# Altium PCB sm.PcbDoc
Units mil, origin at the board's own origin, x right, y up, seen from the top; angles counter-clockwise.
Board outline 3915 x 2455 mil, 2 copper layers (Top Layer, Bottom Layer); 29 components, 39 nets, 161 pads, 47 vias.
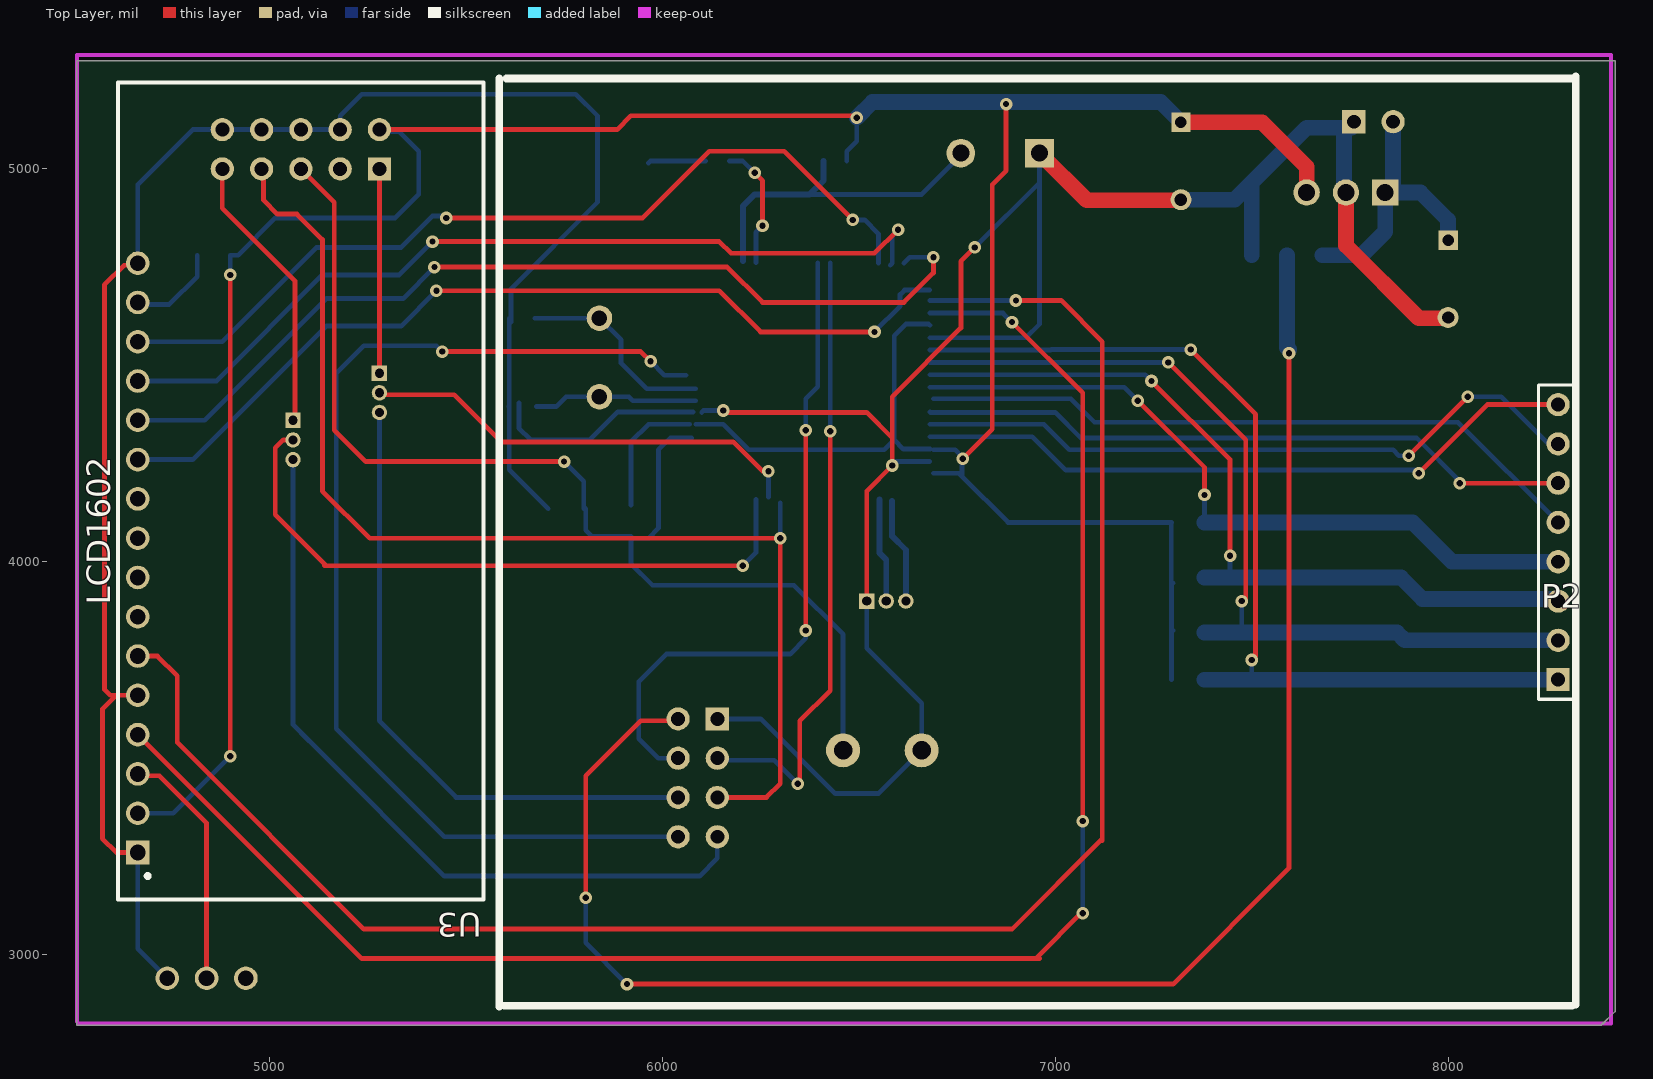
[diagram p0: Top Layer view]
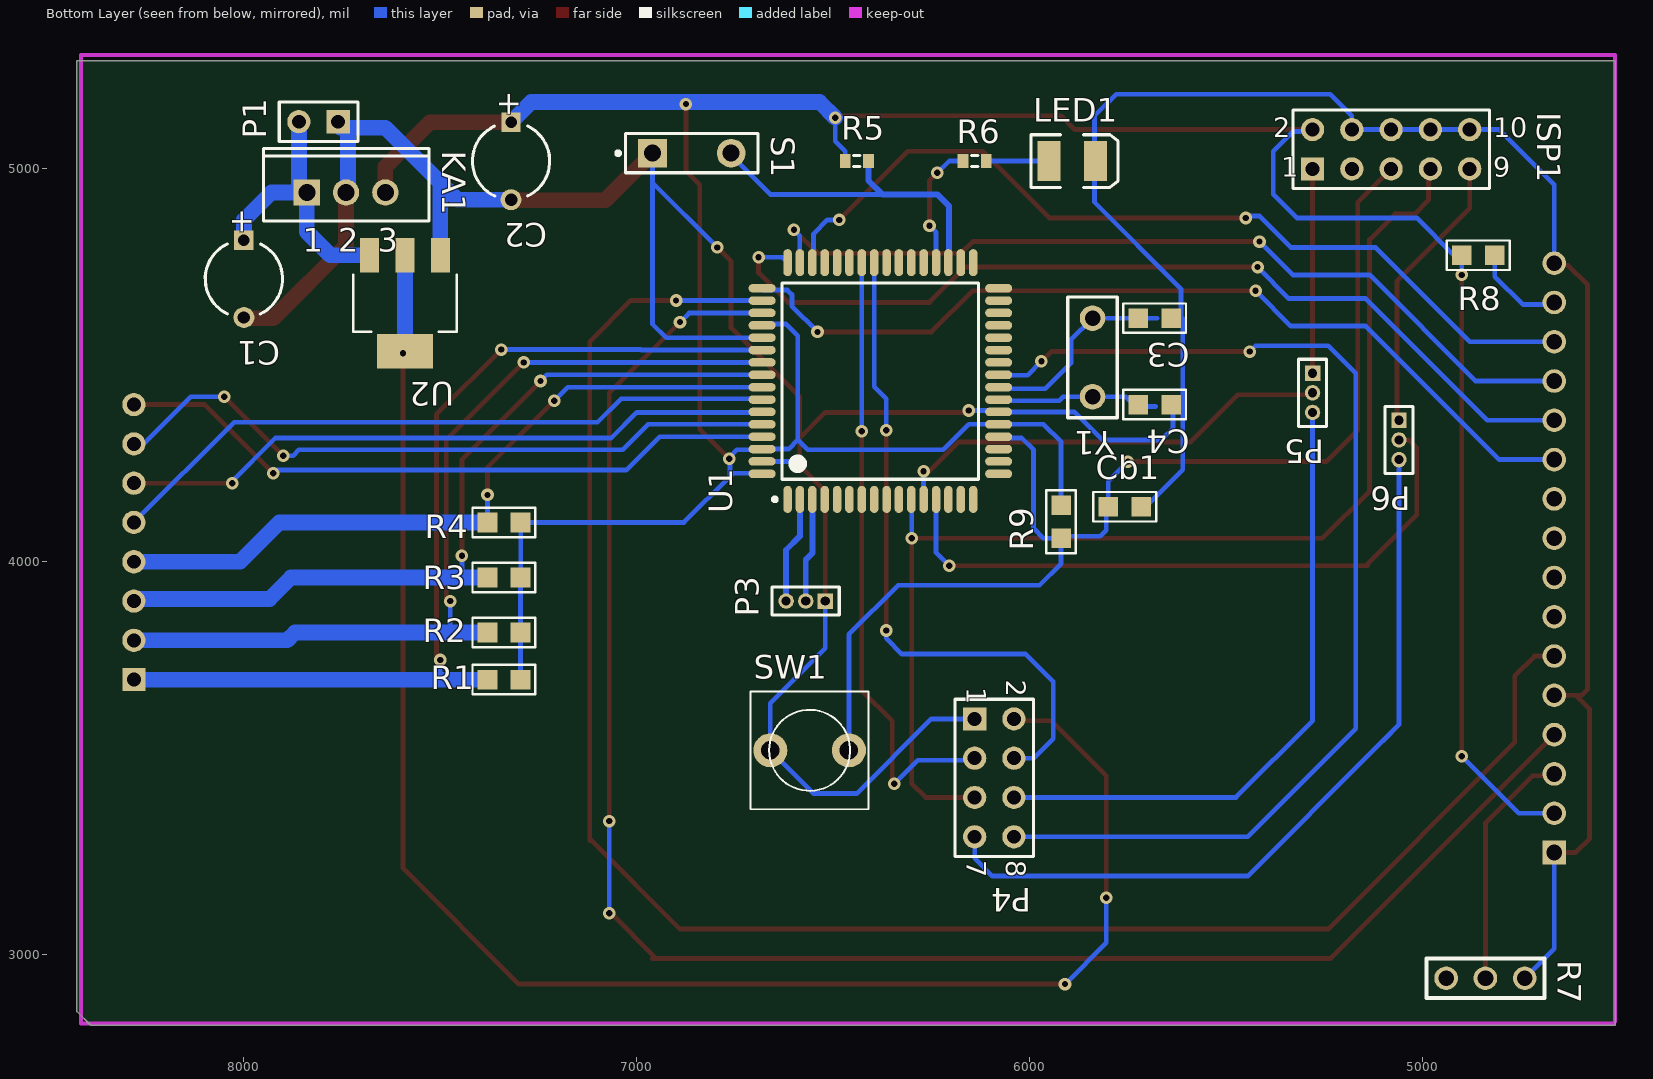
[diagram p1: Bottom Layer view, seen from below]

## Layer stack, top to bottom
Top Layer: signal copper 1.4
Dielectric: dielectric 12.6, FR-4, Dk 4.8
Bottom Layer: signal copper 1.4

## Board outline
4510,2820 8390,2820 8425,2855 8425,5275 4510,5275 4510,2820

## Design rules (kind name [scope] priority, off if disabled: settings)
Clearance Clearance_1 [InNamedPolygon('Bottom Layer-No Net')] p1: gap=30
Clearance [All] p2: gap=10
PolygonConnect [All] p1: connectstyle=Relief reliefconductorwidth=10 reliefentries=4 polygonreliefangle="90 Angle"
RoutingVias [All] p1: holewidth=16 width=32 viastyle="Through Hole" minholewidth=16 minwidth=32 maxholewidth=16 maxwidth=32
SilkscreenOverComponentPads [All] p1: minsilkscreentomaskgap=10
SolderMaskExpansion [All] p1: expansion=4
Width [All] p1: maxlimit=12 minlimit=12 preferedwidth=12
27 further rules are at their usual default settings.

## Components (designator, comment, footprint, x,y, rotation, side; value= is the part's Value field where it differs from the comment)
C1 "Cap Pol1" CAPPR5-5x5 8000,4720 r270 bottom
C2 "Cap Pol1" CAPPR5-5x5 7320,5020 r270 bottom
C3 "Cap" SM/C_0805 5640,4620 r0 bottom
C4 "Cap" SM/C_0805 5640,4400 r0 bottom
Cb1 "10uF" SM/C_0805 5800,4140 r180 bottom
ISP1 "Header 5X2" HDR2X5 5280,5000 r180 bottom
KA1 "Volt Reg" TO-220 7740,4940 r180 bottom
LED1 "LED3" DSO-C2/D5.6 5891.81,5020 r180 bottom
P1 "Header 2" HDR1X2 7760,5120 r0 bottom
P2 "Header 8" HDR1X8 8280,3700 r90 top
P3 "MHDR1X3" MHDR1X3 6520,3900 r0 bottom
P4 "Header 4X2" HDR2X4 6140,3600 r270 bottom
P5 "MHDR1X3" MHDR1X3 5280,4480 r270 bottom
P6 "MHDR1X3" MHDR1X3 5060,4360 r270 bottom
R1 "10K" SM/C_0805 7380,3700 r180 bottom
R2 "10K" SM/C_0805 7380,3820 r180 bottom
R3 "10K" SM/C_0805 7380,3960 r180 bottom
R4 "10K" SM/C_0805 7380,4100 r180 bottom
R5 "Res3" RESC1608L 6440,5020 r180 bottom
R6 "Res3" RESC1608L 6140,5020 r0 bottom
R7 "10k" BienTro 4840,2940 r270 bottom
R8 "560" SM/C_0805 4900,4780 r180 bottom
R9 "10K" SM/C_0805 5920,4060 r90 bottom
S1 "SW-PB" SPST-2 6860,5040 r180 bottom
SW1 "BUTTON 2 PIN" KEYSMALL2 6660,3520 r180 bottom
U1 "ATmega128-16AC" 64A_N 6380,4460 r90 bottom
U2 "LM1117MP-3.3V" SM/SOT223_1234 7500,4780 r0 bottom
U3 "LCD1602" LCD1602 4165,3960 r180 top
Y1 "XTAL" CAPR5.08-7.8x3.2 5840,4520 r270 bottom

## Footprints (in the part's own frame and the unit in brackets; to place one, negate y for a bottom-side part, rotate by r counter-clockwise, add the part's x,y. Pads: shape width x height; smd on the part's side, far side on the other; paste and mask are expansions set on the pad)
64A_N [mm] "Thin QFP, 64-Leads, Body 14x14mm, Pitch 0.8mm, IPC Medium Density"
  oval 1.75x0.55 smd: 1(-7.65,6) 2(-7.65,5.2) 3(-7.65,4.4) 4(-7.65,3.6) 5(-7.65,2.8) 6(-7.65,2) 7(-7.65,1.2) 8(-7.65,0.4) 9(-7.65,-0.4) 10(-7.65,-1.2) 11(-7.65,-2) 12(-7.65,-2.8) 13(-7.65,-3.6) 14(-7.65,-4.4) 15(-7.65,-5.2) 16(-7.65,-6) 33(7.65,-6) 34(7.65,-5.2) 35(7.65,-4.4) 36(7.65,-3.6) 37(7.65,-2.8) 38(7.65,-2) 39(7.65,-1.2) 40(7.65,-0.4) 41(7.65,0.4) 42(7.65,1.2) 43(7.65,2) 44(7.65,2.8) 45(7.65,3.6) 46(7.65,4.4) 47(7.65,5.2) 48(7.65,6)
  oval 0.55x1.75 smd: 17(-6,-7.65) 18(-5.2,-7.65) 19(-4.4,-7.65) 20(-3.6,-7.65) 21(-2.8,-7.65) 22(-2,-7.65) 23(-1.2,-7.65) 24(-0.4,-7.65) 25(0.4,-7.65) 26(1.2,-7.65) 27(2,-7.65) 28(2.8,-7.65) 29(3.6,-7.65) 30(4.4,-7.65) 31(5.2,-7.65) 32(6,-7.65) 49(6,7.65) 50(5.2,7.65) 51(4.4,7.65) 52(3.6,7.65) 53(2.8,7.65) 54(2,7.65) 55(1.2,7.65) 56(0.4,7.65) 57(-0.4,7.65) 58(-1.2,7.65) 59(-2,7.65) 60(-2.8,7.65) 61(-3.6,7.65) 62(-4.4,7.65) 63(-5.2,7.65) 64(-6,7.65)
  silkscreen extent -7.77,-6.35 6.35,6.95, body extent -7,-7 7,7, height 1.2
BienTro [mil]
  round 60 hole 40: 0(0,100) 1(0,0) 2(0,-100)
  silkscreen extent -50,-150 50,150
CAPPR5-5x5 [mm] "Capacitor, Electrolytic, Radial; Body 5 x 5 mm (Dia.xH typ); Pin Spacing 5 mm (typ)"
  rect 1.25x1.25 hole 0.75: 1(-2.5,0)
  round 1.35 hole 0.8: 2(2.5,0)
  silkscreen extent -2.26,-2.5 2.27,2.5
CAPR5.08-7.8x3.2 [mm] "Capacitor, Ceramic, Thru-Hole, Dipped Radial; Body 7.8 x 3.2 mm (WxT) Pin Spacing 5.08 mm (typ)"
  round 1.65 hole 1: 1(-2.54,0) 2(2.54,0)
  silkscreen extent -3.9,-1.6 3.9,1.6
DSO-C2/D5.6 [mm] "SM LED; 2 C-Bend Leads; Body 3.5 x 2.8 x 1.9 mm, inc leads (LxWxH typ)"
  rect 1.5x2.6 smd: 1(-1.5,0) 2(1.5,0)
  silkscreen extent -2.65,-1.7 2.95,1.7
HDR1X2 [mm] "Connector; Header; 2 Position"
  rect 1.5x1.5 hole 0.9: 1(0,0)
  round 1.5 hole 0.9: 2(2.54,0)
  silkscreen extent -1.27,-1.27 3.81,1.27
HDR1X8 [mm] "Connector; Header; 8 Position"
  rect 1.5x1.5 hole 0.9: 1(0,0)
  round 1.5 hole 0.9: 2(2.54,0) 3(5.08,0) 4(7.62,0) 5(10.16,0) 6(12.7,0) 7(15.24,0) 8(17.78,0)
  silkscreen extent -1.27,-1.27 19.05,1.27
HDR2X4 [mm] "Connector; Header; 4x2 Position"
  rect 1.5x1.5 hole 0.9: 1(0,0)
  round 1.5 hole 0.9: 2(0,2.54) 3(2.54,0) 4(2.54,2.54) 5(5.08,0) 6(5.08,2.54) 7(7.62,0) 8(7.62,2.54)
  silkscreen extent -1.27,-1.27 8.89,3.81
HDR2X5 [mm] "Connector; Header; 5x2 Position"
  rect 1.5x1.5 hole 0.9: 1(0,0)
  round 1.5 hole 0.9: 2(0,2.54) 3(2.54,0) 4(2.54,2.54) 5(5.08,0) 6(5.08,2.54) 7(7.62,0) 8(7.62,2.54) 9(10.16,0) 10(10.16,2.54)
  silkscreen extent -1.27,-1.27 11.43,3.81
KEYSMALL2 [mil]
  round 86.6 hole 47.23: 1(0,0) 2(200,0)
  silkscreen extent -50,-150 250,150
LCD1602 [mil]
  rect 60x60 hole 40: 1(-500,700)
  round 60 hole 40: 2(-500,600) 3(-500,500) 4(-500,400) 5(-500,300) 6(-500,200) 7(-500,100) 8(-500,0) 9(-500,-100) 10(-500,-200) 11(-500,-300) 12(-500,-400) 13(-500,-500) 14(-500,-600) 15(-500,-700) 16(-500,-800)
  silkscreen extent -1380,-1260 -450,820
MHDR1X3 [mm] "Connector; Header; 3 Position"
  rect 1x1 hole 0.6: 1(0,0)
  round 1 hole 0.6: 2(1.27,0) 3(2.54,0)
  silkscreen extent -0.9,-0.9 3.44,0.9
RESC1608L [mm] "Chip Resistor, Body 1.6x0.8mm, IPC High Density"
  rect 0.7x0.9 smd: 1(-0.75,0) 2(0.75,0)
  silkscreen extent -0.2,-0.35 0.2,0.35, body extent -0.85,-0.48 0.85,0.48, height 0.9
SM/C_0805 [mil]
  rect 50x50 smd: 1(0,0) 2(84,0)
  silkscreen extent -38,-38 122,38
SM/SOT223_1234 [mil]
  rect 48x88 smd: 1(0,0) 2(90,0) 3(180,0)
  rect 142x88 smd: 4(90,244)
  silkscreen extent -42,49 222,195
SPST-2 [mm] "Circuit Breaker; 2 Leads"
  rect 1.85x1.85 hole 1.1: 1(-2.54,0)
  round 1.85 hole 1.1: 2(2.54,0)
  silkscreen extent -4.89,-1.27 4.28,1.27
TO-220 [mm] "TO, Thru-Hole, Vertical, Heatsink Mounted; 3 In-Line Leads; Pitch 2.54 mm"
  rect 1.7x1.7 hole 1.1: 1(-2.54,0)
  round 1.7 hole 1.1: 2(0,0) 3(2.54,0)
  silkscreen extent -5.35,-1.85 5.35,2.85

## Part data
C1 C2: "Polarized Capacitor (Radial)"
C3 C4: "Capacitor"
Cb1: library part "CAP POL 250"
ISP1: "Header, 5-Pin, Dual row"
KA1: "Voltage Regulator"
LED1: "Typical BLUE SiC LED"
P1: "Header, 2-Pin"
P2: "Header, 8-Pin"
P3 P5 P6: "Header, 3-Pin"
P4: "Header, 4-Pin, Dual row"
R1 R2 R3 R4 R9: library part "R 300"
R5 R6: "Resistor"
R7: library part BienTro
R8: library part Resistor
S1: "Switch"
U1: "8-Bit AVR Microcontroller with 128K Bytes of In-System Programmable Flash Memory"
U2: library part LM1117MP-3.3, "800mA Low-Dropout Linear Regulator"
Y1: "Crystal Oscillator"

## Via types
v1: diameter 32, hole 16, Top Layer to Bottom Layer, 47 vias

## Nets (pads, with @x,y where several pads share a name; then routed paths per layer and width w, separated by ;. In a path a pad name is that pad's centre, name@x,y a point inside that pad or via, vN(x,y) a via of type N, cw(c..) or ccw(c..) an arc to the next point about the centre after c; other vN are vias at no path point)
3.3V: P4.2 U2.2 U2.4 | length 4238.8
  Top Layer w12: v1(5805,3145) 5805,3455 5945,3595 P4.2@6045,3595 ; v1(5910,2925) 7300,2925 7595,3220 v1(7595,4531)
  Bottom Layer w12: v1(5805,3145) 5805,3030 v1(5910,2925) ; U2.4 v1(7595,4531)
  Bottom Layer w40: U2.2 7590,4545 U2.4@7595,4540
5V: R7.2
9V: C1.1 KA1.1 P1.2 U2.3 | length 724.2
  Bottom Layer w40: U2.3 7780,4780 7840,4840 KA1.1 ; KA1.1@7835,4940 KA1.1@7840,4945 ; P1.2 7860,4965 KA1.1@7840,4945 ; C1.1@8000,4815 C1.1 8000,4870 7930,4940 KA1.1 ; KA1.1 KA1.1@7840,4945
BT1: R5.2 S1.2 U1.35 | length 848.5
  Bottom Layer w12: 6375,4935 6660,4935 S1.2@6760,5035
  Bottom Layer w15: U1.35@6205,4765 6205,4905 6235,4935 6375,4935 6410.47,4970.47 R5.2
CE: P4.3 U1.42 | length 1599.2
  Top Layer w12: v1(6345,3435) 6350,3440 6350,3595 6427.24,3672.24 v1(6427.24,4332.24)
  Bottom Layer w12: P4.3 6145,3495 6285,3495 v1(6345,3435) v1@6350,3430 ; v1(6427.24,4332.24) U1.42
CSN: P4.4 U1.41 | length 1705.2
  Top Layer w12: v1(6365,3825) v1(6365,4335)
  Bottom Layer w12: P4.4 5990,3500 5940,3550 5940,3695 6010,3765 6325,3765 6365,3805 v1(6365,3825) ; v1(6365,4335) 6365,4415 6395.75,4445.75 U1.41
DB4: U1.49 U3.11 | length 2298.3
  Top Layer w12: v1(5425,4690) 6145,4690 6250,4585 v1(6540,4585)
  Bottom Layer w12: U3.11 4805,4260 5145,4600 5335,4600 v1(5425,4690) ; v1(6540,4585) 6605,4650 6605,4680 6616.55,4691.55 U1.49@6680,4691.55
DB5: U1.48 U3.12 | length 2386.1
  Top Layer w12: v1(5420,4750) 6120,4750 ; 6130,4750 6120,4750 ; v1(6690,4775) 6690,4735 6615,4660 6255,4660 6165,4750 6120,4750
  Bottom Layer w12: U3.12 4835,4360 5145,4670 5340,4670 v1(5420,4750) ; U1.48@6615,4760 6630,4775 v1(6690,4775)
DB6: U1.47 U3.13 | length 2237.6
  Top Layer w12: v1(5415,4815) 5880,4815 ; 5900,4815 5880,4815 ; v1(6600,4845) 6540,4785 6175,4785 6145,4815 5880,4815
  Bottom Layer w12: U3.13 4865,4460 5135,4730 5330,4730 v1(5415,4815) ; U1.47@6580.06,4755 6585,4759.94 6585,4830 v1(6600,4845)
DB7: U1.46 U3.14 | length 2252
  Top Layer w12: v1(5450,4875) 5950,4875 6120,5045 6310,5045 v1(6485,4870)
  Bottom Layer w12: U3.14 4880,4560 5120,4800 5335,4800 5415,4880 5445,4880 v1(5450,4875) ; v1(6485,4870) 6515,4870 6550,4835 U1.46@6550,4760
E: U1.50 U3.6 | length 4690.2
  Top Layer w12: U3.6 4715,3760 4765,3710 4765,3540 5240,3065 6890,3065 7120,3295 ; v1(6900,4665) 7015,4665 7120,4560 7120,3295 ; 7120,3290 7120,3295
  Bottom Layer w12: U1.50 6899.72,4664.72 v1(6900,4665)
GND: C1.2 C2.2 C3.1 C4.1 Cb1.2 ISP1.4 ISP1.6 ISP1.8 ISP1.10 KA1.2 LED1.2 P1.1 P3.1 P4.1 R7.0 S1.1 SW1.1 U1.22 U1.53 U1.63 U2.1 U3.1 U3.5 U3.16 | length 10709.9
  Top Layer w12: U3.16@4660,4755 4630,4755 4580,4705 4580,3675 4595,3660 4610,3660 ; U3.1 4610,3260 4575,3295 4575,3625 4610,3660 ; U3.5 4610,3660 ; v1@6160,4380 6520,4380 6585,4315 ; P3.1 6520,4180 v1(6585,4245) 6585,4315 ; v1(6795,4800) 6760,4765 6760,4595 6585,4420 6585,4315
  Top Layer w40: S1.1 7080,4920 C2.2@7325,4920 ; KA1.2 7740,4805 7925,4620 C1.2@8005,4620
  Bottom Layer w12: U3.1@4665,3265 U3.1 4665,3015 R7.0 ; U3.16 4665,4960 4805,5100 ISP1.10 ISP1.8 ISP1.6 5175,5100 ISP1.4@5180,5095 ; ISP1.4 5180,5135 5235,5190 5780,5190 5835,5135 5835,4915 5615,4695 C3.1@5615,4610 ; 5610,4395 5610.47,4395.47 ; 5610.47,4620 5610.47,4395.47 ; C4.1@5635,4405 5635,4340 5665,4310 5815,4310 5886.26,4381.26 U1.22 ; Cb1.2@5710,4135 5610.47,4234.53 5610.47,4395.47 ; U1.22@6100,4380 6105,4385 v1(6155,4385) ; P4.1@6135,3600 P4.1 6250,3600 6440,3410 6550,3410 SW1.1 6660,3640 6520,3780 P3.1@6520,3895 ; v1(6585,4245) 6595,4255 U1.63@6680,4255 ; U1.53 6925.24,4570.24 6960,4605 6960,4965 ; v1(6795,4800) 6960,4965 ; S1.1@6960,5045 S1.1 6960,4965
  Bottom Layer w40: C2.2 7456.57,4921.57 7500,4965 ; U2.1 7500,4965 ; KA1.2@7735,4945 7735,5095 P1.1@7745,5105 ; P1.1@7755,5105 P1.1@7745,5105 ; P1.1 P1.1@7745,5105 ; 7500,4965 7640,5105 P1.1@7745,5105
INT: P4.8 U1.25 | length 2839
  Top Layer w12: v1(5440,4535) 5945,4535 v1(5970,4510)
  Bottom Layer w12: v1(5440,4535) 5425,4550 5240,4550 5170,4480 5170,3575 5445,3300 P4.8 ; v1(5970,4510) 6005,4475 U1.25@6060,4475
LED1: R6.2 U1.36 | length 321.5
  Top Layer w12: v1(6235,4990) 6255,4970 v1(6255,4855)
  Bottom Layer w12: R6.2@6170,5020 6205,5020 v1(6235,4990) ; U1.36 6238.27,4838.27 v1(6255,4855)
MISO: P6.2 U1.13 | length 1649.7
  Top Layer w12: P6.2@5055,4310 5035,4310 5015,4290 5015,4120 5145,3990 ; 5140,3990 5145,3990 ; v1(6205,3990) 5145,3990
  Bottom Layer w12: v1(6205,3990) 6238.27,4023.27 U1.13
MISO1: P4.7 P6.3 | length 2051.8
  Bottom Layer w12: P6.3 5060,3585 5125,3520 ; 5080,3565 5125,3520 ; P4.7 6140,3245 6095,3200 5445,3200 5125,3520
MISO2: ISP1.9 P6.1 | length 735.8
  Top Layer w12: ISP1.9 4880,4900 4960,4820 ; 4970,4810 4960,4820 ; P6.1@5065,4355 5065,4715 4960,4820
MOSI: P5.2 U1.12 | length 1147.8
  Top Layer w12: P5.2 5285,4425 5470,4425 5590,4305 6180,4305 6255,4230 v1(6270,4230) ; v1@6270,4235 v1(6270,4230) ; v1@6275,4230 v1(6270,4230)
  Bottom Layer w12: U1.12@6270,4165 v1(6270,4230)
MOSI1: P4.6 P5.3 | length 1655.8
  Bottom Layer w12: P5.3 5280,3595 5475,3400 5525,3400 ; 5495,3400 5525,3400 ; P4.6 5525,3400
MOSI2: ISP1.1 P5.1 | length 560
  Top Layer w12: P5.1 5280,4820 ; 5280,4780 5280,4820 ; ISP1.1 5280,4820
NetLED1_1: LED1.1 R6.1 | length 147.5
  Bottom Layer w12: LED1.1@5965,5015 5970,5020 R6.1
NetP2_1: P2.1 R1.1 U1.54 | length 2473.9
  Top Layer w12: v1(7345,4540) 7510,4375 7510,3760 v1(7500,3750)
  Bottom Layer w12: U1.54 6988.74,4538.74 6990,4540 v1(7345,4540) ; 7495,3695 7500,3700 v1(7500,3750)
  Bottom Layer w40: R1.1 7495,3700 ; 7500,3700 P2.1@8275,3700
NetP2_2: P2.2 R2.1 U1.55 | length 2285.9
  Top Layer w12: v1(7287.76,4507.24) 7485,4310 7485,3905 7480,3900 v1(7475,3900)
  Bottom Layer w12: U1.55 v1(7287.76,4507.24) ; 7475,3820 v1(7475,3900)
  Bottom Layer w40: R2.1 7475,3820 7870,3820 7890,3800 P2.2@8275,3800
NetP2_3: P2.3 R3.1 U1.56 | length 2076
  Top Layer w12: v1(7245,4460) 7445,4260 v1(7445,4015)
  Bottom Layer w12: U1.56 7229.25,4475.75 v1(7245,4460) ; 7445,3955 7445,3960 v1(7445,4015)
  Bottom Layer w40: R3.1 7445,3960 7880,3960 7935,3905 P2.3@8275,3905
NetP2_4: P2.4 R4.1 U1.57 | length 1869.8
  Top Layer w12: v1(7210,4410) 7380,4240 v1(7380,4170)
  Bottom Layer w12: U1.57 7175.75,4444.25 v1(7210,4410) ; R4.1@7380,4095 R4.1 v1(7380,4170)
  Bottom Layer w40: R4.1 7910,4100 8010,4000 P2.4
NetP2_5: P2.5 U1.58 | length 1720.5
  Bottom Layer w12: U1.58@6690,4415 7040,4415 7100,4355 8025,4355 P2.5
NetP2_6: P2.6 U1.59 | length 1686
  Top Layer w12: v1(8030,4200) 8265,4200 P2.6@8270,4205
  Bottom Layer w12: U1.59 6682.44,4380 7000,4380 7065,4315 7720,4315 ; 7730,4315 7720,4315 ; v1(8030,4200) 8035,4200 7920,4315 7720,4315
NetP2_7: P2.7 U1.60 | length 1768.7
  Top Layer w12: v1(7900,4270) v1(8050,4420)
  Bottom Layer w12: U1.60 6971.35,4349.76 7036.11,4285 7655,4285 ; 7675,4285 7655,4285 ; v1(7900,4270) 7875,4270 7860,4285 7655,4285 ; v1(8050,4420) 8135,4420 8255,4300 P2.7 P2.7@8285,4300
NetP2_8: P2.8 U1.61 | length 1704.9
  Top Layer w12: v1(7925,4225) 8100,4400 P2.8@8275,4400
  Bottom Layer w12: U1.61 6941.73,4318.27 7026.73,4233.27 7916.73,4233.27 v1(7925,4225)
NetR7_1: R7.1 U3.3 | length 619.7
  Top Layer w12: U3.3@4665,3455 4720,3455 4840,3335 R7.1
NetR8_2: R8.2 U3.15 | length 234.4
  Bottom Layer w12: U3.15@4665,4655 4745,4655 4816,4726 R8.2
RS: U1.51 U3.4 | length 4498.8
  Top Layer w12: U3.4 5235,2990 6950,2990 ; v1(6890,4610) 7070,4430 v1(7070,3340) ; 6960,2990 6950,2990 ; v1@7070,3110 6950,2990
  Bottom Layer w12: U1.51 6681.41,4633 6867,4633 v1(6890,4610) ; v1(7070,3105) v1(7070,3340)
RST: Cb1.1 ISP1.5 R9.1 SW1.2 U1.20 | length 3006.8
  Top Layer w12: ISP1.5 5165,4915 5165,4335 5245,4255 v1(5750,4255)
  Bottom Layer w12: v1(5750,4255) 5800,4205 Cb1.1 ; Cb1.1@5800,4135 Cb1.1 ; U1.20@6075,4315 6020,4315 5990,4285 5990,4085 5965,4060 R9.1@5925,4060 ; SW1.2 6460,3815 6335,3940 5975,3940 5920,3995 R9.1 ; Cb1.1 5805,4135 5805,4080 5820,4065 R9.1@5920,4065 ; R9.1 R9.1@5920,4065 ; R9.1 R9.1@5925,4060 ; R9.1@5920,4065 R9.1@5925,4060
RX: P3.3 U1.2 | length 269.5
  Bottom Layer w15: U1.2@6585,4155 6585,4065 6620,4030 P3.3
SCK: ISP1.7 P4.5 U1.11 | length 3027.7
  Top Layer w12: ISP1.7 4985,4995 4985,4920 5020,4885 5070,4885 5135,4820 5135,4220 ; 5135,4210 5135,4220 ; P4.5 6265,3400 6300,3435 v1(6300,4060) 5255,4060 5135,4180 5135,4220
  Bottom Layer w12: v1(6300,4060) U1.11@6300,4150
TX: P3.2 U1.3 | length 270.8
  Bottom Layer w15: U1.3 6553.23,4021.77 6570,4005 P3.2 P3.2@6570,3895
VCC: C2.1 ISP1.2 KA1.3 R1.2 R2.2 R3.2 R4.2 R5.1 R8.1 R9.2 U1.21 U1.52 U1.62 U1.64 U3.2 | length 8472
  Top Layer w12: v1(4900,3505) v1(4900,4730) ; ISP1.2 5885,5100 5920,5135 6490,5135 v1(6495,5130) ; v1(6765,4262.5) 6840,4337.5 6840,4960 6875,4995 v1(6875,5165)
  Top Layer w40: C2.1 7526.57,5118.43 7640,5005 KA1.3 KA1.3@7640,4935
  Bottom Layer w12: U3.2@4665,3365 4670,3360 4755,3360 v1(4900,3505) ; v1(4900,4730) R8.1 4920,4780 5015,4875 5320,4875 5380,4935 5380,5045 5330,5095 ISP1.2@5290,5095 ; R9.2 5920,4305 5965,4350 U1.21@6070,4350 ; U1.21@6085,4350 6155,4350 6220,4285 6565,4285 6590,4310 ; R5.1 6469.53,5045 6495,5070.47 v1(6495,5130) ; U1.62 6613.23,4286.77 6590,4310 ; U1.52 6677.91,4605 6620,4605 6590,4575 6590,4310 ; U1.64@6690,4225 6755,4225 6762.5,4217.5 ; U1.62@6690,4285 6745,4285 v1@6762.5,4267.5 ; v1@6762.5,4260 6762.5,4217.5 ; R1.2 R2.2 R2.2@7296,3821 ; R2.2@7300,3825 R2.2@7296,3821 ; R3.2@7300,3945 R3.2@7296,3949 ; 6762.5,4217.5 6880,4100 R4.2 7295,4099 7295,3950 R3.2@7296,3949 ; R2.2@7296,3821 R3.2@7296,3949
  Bottom Layer w40: v1(6495,5130) 6535,5170 7268.43,5170 C2.1
X1: C3.2 U1.24 Y1.1 | length 519.7
  Bottom Layer w12: 5675,4620 Y1.1 5895,4565 5895,4505 5960,4440 U1.24@6085,4440
X2: C4.2 U1.23 Y1.2 | length 419.5
  Bottom Layer w12: 5680,4395 5730,4395 5755,4420 Y1.2 5915,4420 5925,4410 U1.23@6085,4410
pads on no net: ISP1.3 U1.1 U1.4 U1.5 U1.6 U1.7 U1.8 U1.9 U1.10 U1.14 U1.15 U1.16 U1.17 U1.18 U1.19 U1.26 U1.27 U1.28 U1.29 U1.30 U1.31 U1.32 U1.33 U1.34 U1.37 U1.38 U1.39 U1.40 U1.43 U1.44 U1.45 U3.7 U3.8 U3.9 U3.10

## Keep-outs
Keep-Out Layer:
  lines w10.5: 4510,2830 4510,5290 8415,5290 8415,2825 4515,2825

## Silkscreen, mask and mechanical layers (free items; w line width, h text height)
Top Overlay:
  lines w20: 5585,2867.76 5585,5229.96 ; 5598.46,2870 8315,2870 ; 5603.46,5230 8320,5230 ; 8325,2872.76 8325,5234.96

## Text inside footprints (layer, text, board x,y; h text height)
C1: Bottom Overlay "+" at 8029.53,4899.13 h59.06 r90
C2: Bottom Overlay "+" at 7349.53,5199.13 h59.06 r90
ISP1: Bottom Overlay "2" at 5380,5080 h50; Bottom Overlay "1" at 5360,4980 h50; Bottom Overlay "9" at 4820,4980 h50; Bottom Overlay "10" at 4820,5080 h50
KA1: Bottom Overlay "3" at 7659.69,4789.41 h59.06; Bottom Overlay "2" at 7759.69,4789.41 h59.06; Bottom Overlay "1" at 7849.84,4789.41 h59.06
P4: Bottom Overlay "8" at 6060,3240 h50 r90; Bottom Overlay "7" at 6160,3240 h50 r90; Bottom Overlay "1" at 6160,3680 h50 r90; Bottom Overlay "2" at 6060,3700 h50 r90